# EAGLE board Motor_V2 (EAGLE 9.3.0)
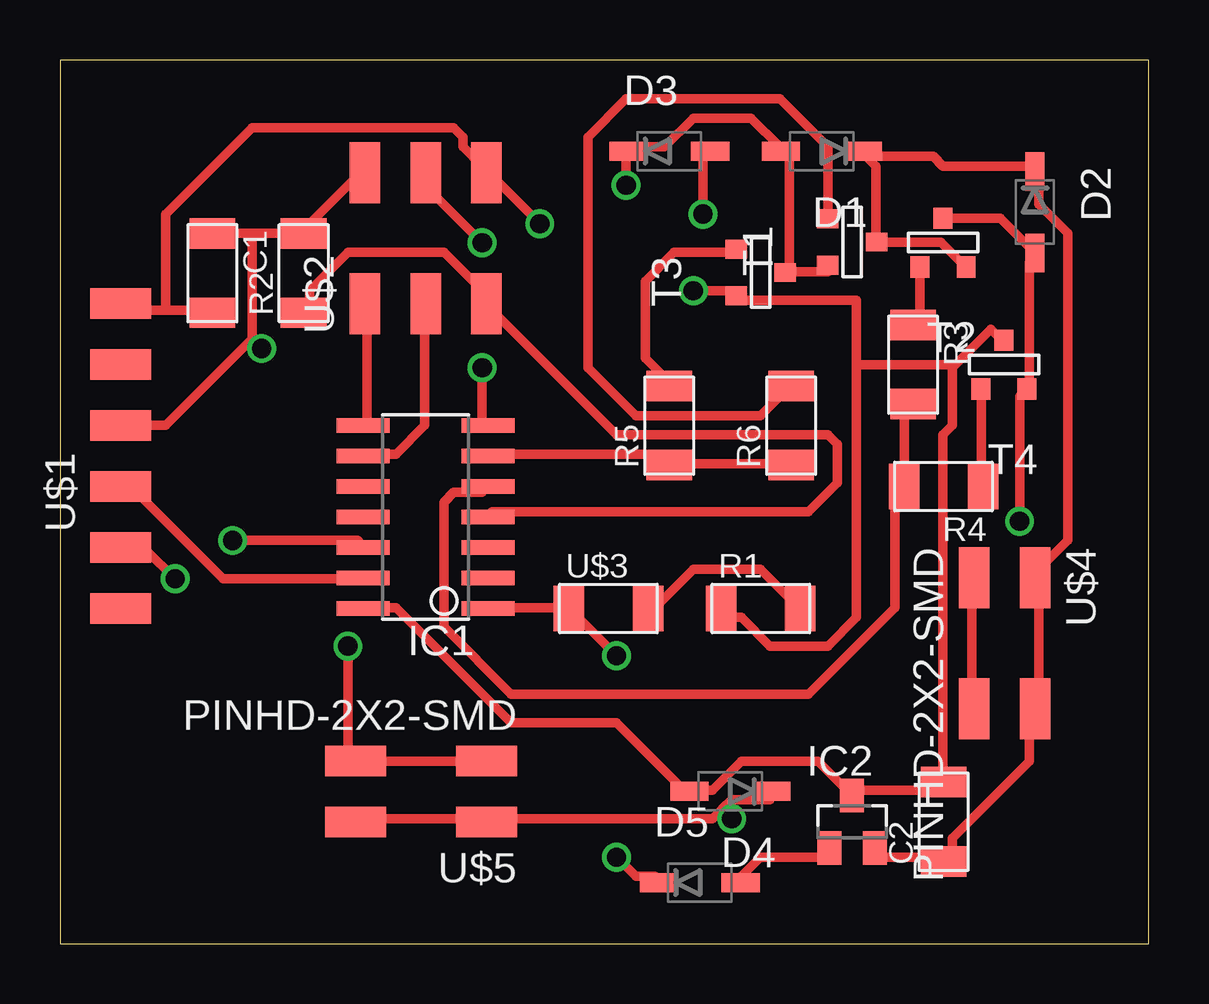
[diagram p0: board, top side]
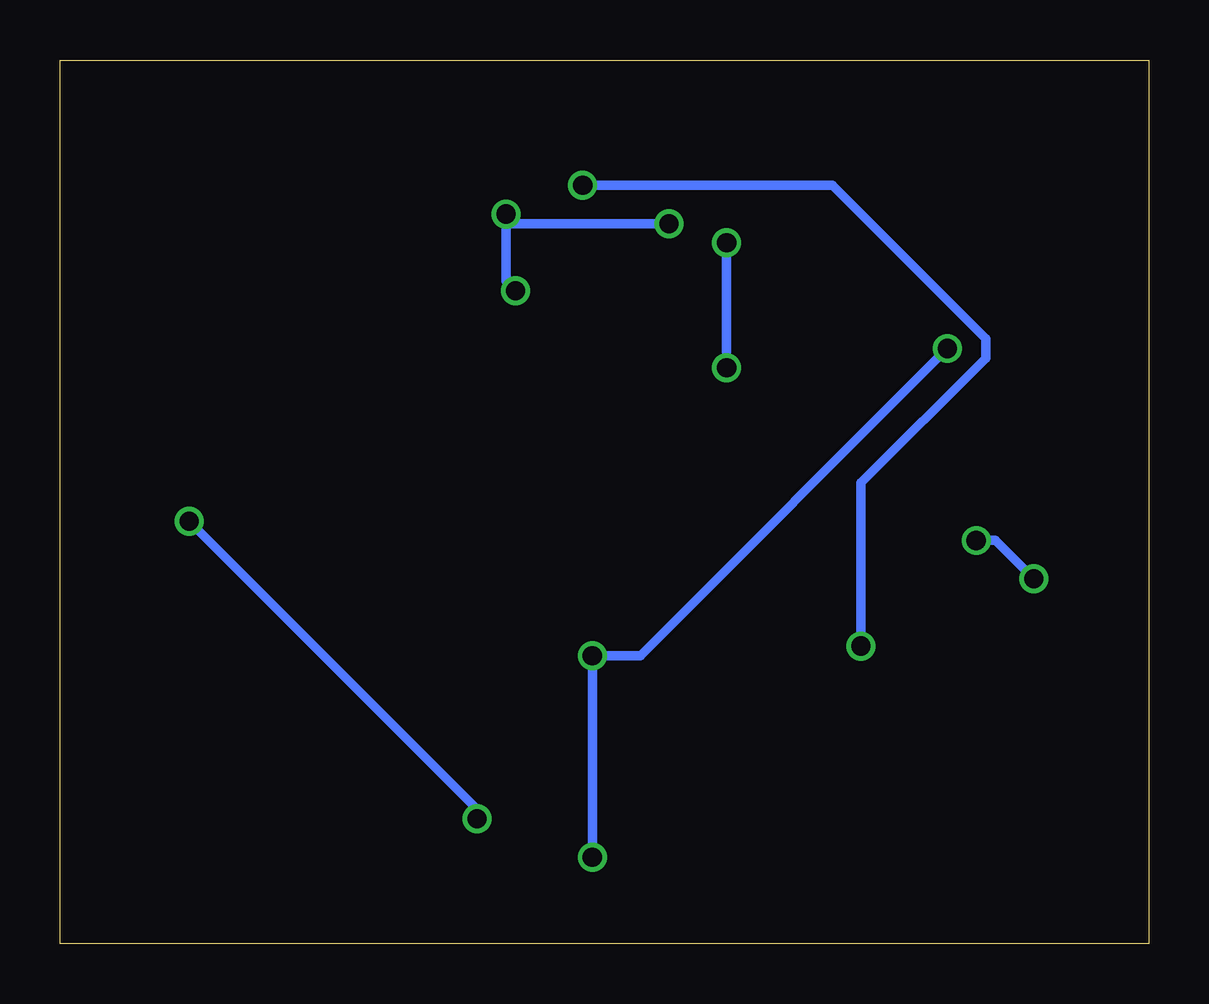
[diagram p1: board, bottom side, seen from below]

Size 45.39 x 36.82 mm. Coordinates in mm from the lower left corner, seen from the top.
Outline: 0,0 45.39,0 45.39,36.82 0,36.82 0,0
Copper layers (1*16): Top 0.035mm / dielectric 1.5mm / Bottom 0.035mm
Design rules "default *": minimum track width 0.4mm, minimum drill 0.8mm, track to track 0.3mm, track to pad 0.3mm, pad to pad 0.4mm, via to via 0.4mm, smd to smd 0.4mm, copper to edge 40mil, drill to drill 6mil, minimum pad ring 10mil, minimum via ring 8mil, stop-mask expansion 4mil, vias tented up to drill 0mil, thermal gap 10mil

## Footprints (pad centres in the part's own frame; a part is rotated, then mirrored left to right if it is on the bottom)
C1206FAB = smd 1.27 x 1.905: 1 -1.651,0; 2 1.651,0
SOD123 = smd 1.6 x 0.8: ANODE 1.7,0; CATHODE -1.7,0
SOIC14 = smd 0.61 x 2.21: 1 -3.81,-2.603; 2 -2.54,-2.603; 3 -1.27,-2.603; 4 0,-2.603; 5 1.27,-2.603; 6 2.54,-2.603; 7 3.81,-2.603; 8 3.81,2.603; 9 2.54,2.603; 10 1.27,2.603; 11 0,2.603; 12 -1.27,2.603; 13 -2.54,2.603; 14 -3.81,2.603
SOT23 = smd 1 x 1.4: 1 -0.95,-1.1; 2 0.95,-1.1; 3 0,1.1
R1206FAB = smd 1.27 x 1.905: 1 -1.651,0; 2 1.651,0
SOT-23 = smd 0.787 x 0.889: 1 0.025,-1.016; 2 -0.94,1.016; 3 0.991,1.016
1X06SMD = smd 2.54 x 1.27: 1 0,6.35; 2 0,3.81; 3 0,1.27; 4 0,-1.27; 5 0,-3.81; 6 0,-6.35
2X03SMD = smd 2.54 x 1.27: 1 -2.54,2.54; 2 2.92,2.54; 3 -2.54,0; 4 2.92,0; 5 -2.54,-2.54; 6 2.92,-2.54
LED1206FAB = smd 1.27 x 1.905: 1 -1.651,0; 2 1.651,0
2X02SMD = smd 2.54 x 1.27: 1 -2.54,1.27; 2 2.92,1.27; 3 -2.54,-1.27; 4 2.92,-1.27

## Placement (x,y rotation side)
C1  1uF  [C1206FAB]  6.35,27.94 270 top
C2  1uF  [C1206FAB]  36.83,5.08 90 top
D1  [SOD123]  31.75,33.02 180 top
D2  [SOD123]  40.64,30.48 270 top
D3  [SOD123]  25.4,33.02 0 top
D4  [SOD123]  27.94,6.35 180 top
D5  [SOD123]  26.67,2.54 0 top
IC1  ATTINY44-SSU  [SOIC14]  15.24,17.78 90 top
IC2  [SOT23]  33.02,5.08 0 top
R1  10K  [R1206FAB]  29.21,13.97 0 top
R2  10K  [R1206FAB]  10.16,27.94 90 top
R3  1k  [R1206FAB]  35.56,24.13 270 top
R4  1k  [R1206FAB]  36.83,19.05 180 top
R5  1k  [R1206FAB]  25.4,21.59 90 top
R6  1k  [R1206FAB]  30.48,21.59 90 top
T1  [SOT-23]  33.02,29.21 90 top
T2  [SOT-23]  36.83,29.21 180 top
T3  [SOT-23]  29.21,27.94 90 top
T4  [SOT-23]  39.37,24.13 180 top
U$1  FTDI-SMD-HEADER  [1X06SMD]  2.54,20.32 0 top
U$2  AVRISPSMD  [2X03SMD]  15.24,29.21 90 top
U$3  LEDFAB1206  [LED1206FAB]  22.86,13.97 0 top
U$4  PINHD-2X2-SMD  [2X02SMD]  39.37,12.7 270 top
U$5  PINHD-2X2-SMD  [2X02SMD]  15.24,6.35 180 top

## Library data of the parts
C1 C2 D1-D5 IC1 IC2 R1-R6 T1-T4 U$1-U$5 = fab

## Nets
0: C1.2 C2.2 D3.ANODE D4.ANODE IC1.14 IC2.3 R1.1 T3.2 T4.1 U$1.1 U$2.6
12V: C2.1 D1.CATHODE D2.CATHODE IC2.2 T1.1 T2.2 U$4.1 U$4.2
GND: U$4.3 U$4.4
MISO: IC1.8 U$2.1
MOSI: IC1.7 U$2.4
MOTOR1: IC1.5 R3.2 R4.2
MOTOR2: IC1.6 R5.1 R6.1
N$1: R1.2 U$3.2
N$4: D5.ANODE IC2.1
N$6: IC1.3
N$7: IC1.2
N$10: R6.2 T1.3
N$11: R5.2 T3.3
N$12: IC1.10
N$13: IC1.11
N$15: R4.1 T4.3
N$16: R3.1 T2.3
OUT1: D2.ANODE D4.CATHODE T2.1 T4.2 U$5.1 U$5.2
OUT2: D1.ANODE D3.CATHODE T1.2 T3.1 U$5.3 U$5.4
RST: IC1.4 R2.1 U$2.5
RX: IC1.12 U$1.5
SCK: IC1.9 U$2.3
TX: IC1.13 U$1.4
VCC: C1.1 D5.CATHODE IC1.1 R2.2 U$1.3 U$2.2 U$3.1

## Tracks (layer width: path | path; a pad name or v marks a point on that pad's centre or on a via)
0  (via drill 0.8)
  Top 0.4: IC1.14 12.8,14 14,14 18.8,9.2 23.2,9.2 26,6.4 D4.ANODE 26.4,6.4 27.2,6.4 28.4,7.6 31.6,7.6 IC2.3 33.2,6.4 36.8,6.4 C2.2 36.8,6.8 36.8,21.2 37.2,21.6 37.2,24 | 4.4,26.4 2.8,26.4 U$1.1 | 4.4,26.4 6,26.4 C1.2 | 4.4,26.4 4.4,30.4 8,34 16.4,34 16.8,33.6 16.8,33.2 17.6,32.4 U$2.6 18,32 v20,30 | T4.1 39.2,25.2 38.8,25.6 37.2,24 | v26.8,30.4 26.8,32.8 D3.ANODE | v26.4,27.2 28,27.2 T3.2 28.4,26.8 33.2,26.8 33.2,24.13 | 33.2,24.13 33.2,13.6 32,12.4 29.6,12.4 28.4,13.6 27.6,13.6 R1.1 | 33.2,24.13 37.07,24.13 37.2,24
  Bottom 0.4: 26.8,30 26.8,27.6 v26.4,27.2 | 26.8,30 v20,30 | 26.8,30 v26.8,30.4
12V
  Top 0.4: 34.4,29.2 T1.1 | 33.6,32.8 34,32.4 34,29.6 T1.1 | 33.6,32.8 36.4,32.8 36.8,32.4 40.4,32.4 D2.CATHODE 40.8,32 40.8,30.8 42,29.6 42,16.8 40.8,15.6 U$4.1 40.8,15.2 40.8,10 U$4.2 40.4,9.6 40.4,7.6 37.2,4.4 37.2,3.6 C2.1 36.8,3.6 34,3.6 IC2.2 | 33.6,32.8 D1.CATHODE | T2.2 36.73,29.23 T1.1
GND
  Top 0.4: U$4.4 38,10 38,15.2 U$4.3
MISO
  Top 0.4: IC1.8 12.8,21.6 12.8,26.4 U$2.1
MOSI  (via drill 0.8)
  Top 0.4: v17.6,24 17.6,21.6 IC1.7 | v17.6,29.2 15.6,31.2 15.6,32 U$2.4
  Bottom 0.4: v17.6,29.2 v17.6,24
MOTOR1
  Top 0.4: R3.2 35.2,22.4 35.2,19.2 R4.2 34.8,18.8 34.8,14 31.2,10.4 18.8,10.4 16,13.2 16,18.4 16.4,18.8 17.6,18.8 IC1.5
MOTOR2
  Top 0.4: R6.1 30.4,20 25.6,20 R5.1 25.2,20 24.8,20.4 18,20.4 IC1.6
N$1
  Top 0.4: U$3.2 24.8,14 26.4,15.6 29.2,15.6 30.8,14 R1.2
N$4
  Top 0.4: IC2.1 32,3.6 29.2,3.6 28.4,2.8 D5.ANODE
N$10
  Top 0.4: T1.3 32,30.4 32,33.2 30,35.2 23.6,35.2 22,33.6 22,24 24,22 29.2,22 30.4,23.2 R6.2
N$11
  Top 0.4: T3.3 28,28.8 25.6,28.8 24.4,27.6 24.4,24.4 25.2,23.6 R5.2
N$15
  Top 0.4: T4.3 38.4,22.8 38.4,19.2 R4.1
N$16
  Top 0.4: R3.1 35.84,26.06 T2.3
OUT1  (via drill 0.8)
  Top 0.4: 27.6,5.6 27.2,5.2 18,5.2 U$5.1 17.6,5.2 12.4,5.2 U$5.2 | 27.6,5.6 28,6 29.6,6 D4.CATHODE | v40,17.6 40,22.8 T4.2 40.4,23.2 40.4,28.4 D2.ANODE 39.19,30.23 T2.1 | 27.6,5.6 v28,5.2
  Bottom 0.4: v40,17.6 28,5.6 v28,5.2
OUT2  (via drill 0.8)
  Top 0.4: U$5.3 17.6,7.6 12.4,7.6 U$5.4 12,8 v12,12.4 | 30.4,28 32,28 T1.2 | 30.4,28 30.4,32.8 D1.ANODE 30,33.2 28.8,34.4 26.4,34.4 25.2,33.2 24,33.2 D3.CATHODE 23.6,32.8 v23.6,31.6 | 30.4,28 T3.1
  Bottom 0.4: v12,12.4 12,19.2 6.8,24.4 6.8,25.2 13.2,31.6 v23.6,31.6
RST
  Top 0.4: R2.1 10.4,26.4 10.4,27.2 12,28.8 16,28.8 18,26.8 U$2.5 18,26.4 23.2,21.2 32,21.2 32.4,20.8 32.4,19.2 31.2,18 18,18 IC1.4
RX  (via drill 0.8)
  Top 0.4: v7.2,16.8 12.4,16.8 IC1.12 | v4.8,15.2 3.6,16.4 2.8,16.4 U$1.5
  Bottom 0.4: v7.2,16.8 6.4,16.8 v4.8,15.2
SCK
  Top 0.4: IC1.9 12.8,20.4 14,20.4 15.2,21.6 15.2,26.4 U$2.3
TX
  Top 0.4: IC1.13 12.4,15.2 6.8,15.2 2.8,19.2 U$1.4
VCC  (via drill 0.8)
  Top 0.4: v23.2,3.6 24,2.8 24.8,2.8 D5.CATHODE | v23.2,12 21.6,13.6 U$3.1 21.2,14 18,14 IC1.1 | 10,29.6 8,29.6 | 8,29.6 6.4,29.6 C1.1 | 8,25.2 4.4,21.6 2.8,21.6 U$1.3 | 8,29.6 8,25.2 | 10,29.6 12.4,32 U$2.2 | 10,29.6 R2.2 | 8,25.2 v8.4,24.8
  Bottom 0.4: v23.2,3.6 v23.2,12 21.2,12 v8.4,24.8